# EAGLE board weatherbuoy pcb (EAGLE 9.7.0)
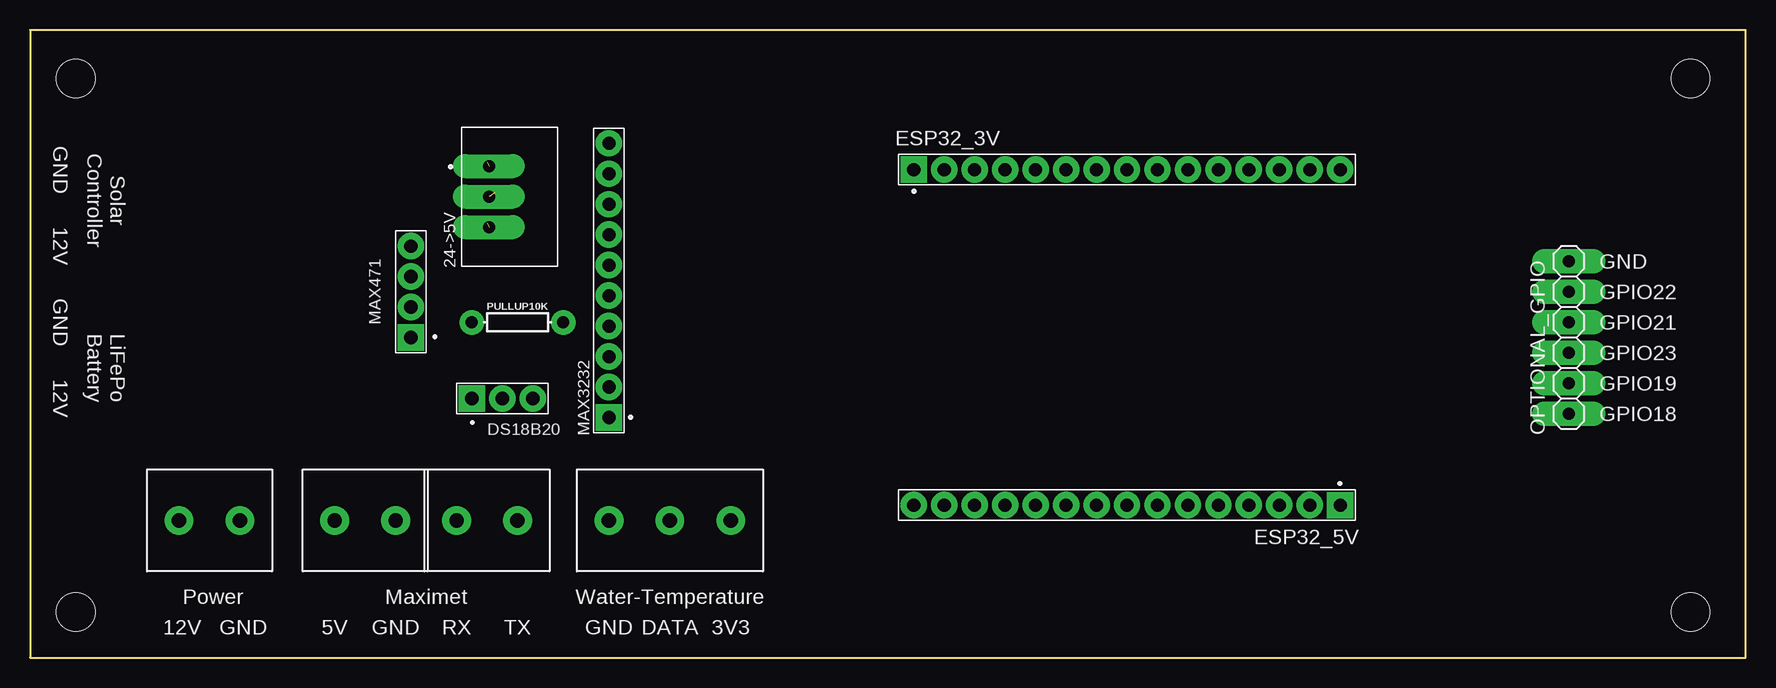
[diagram p0: board, top side]
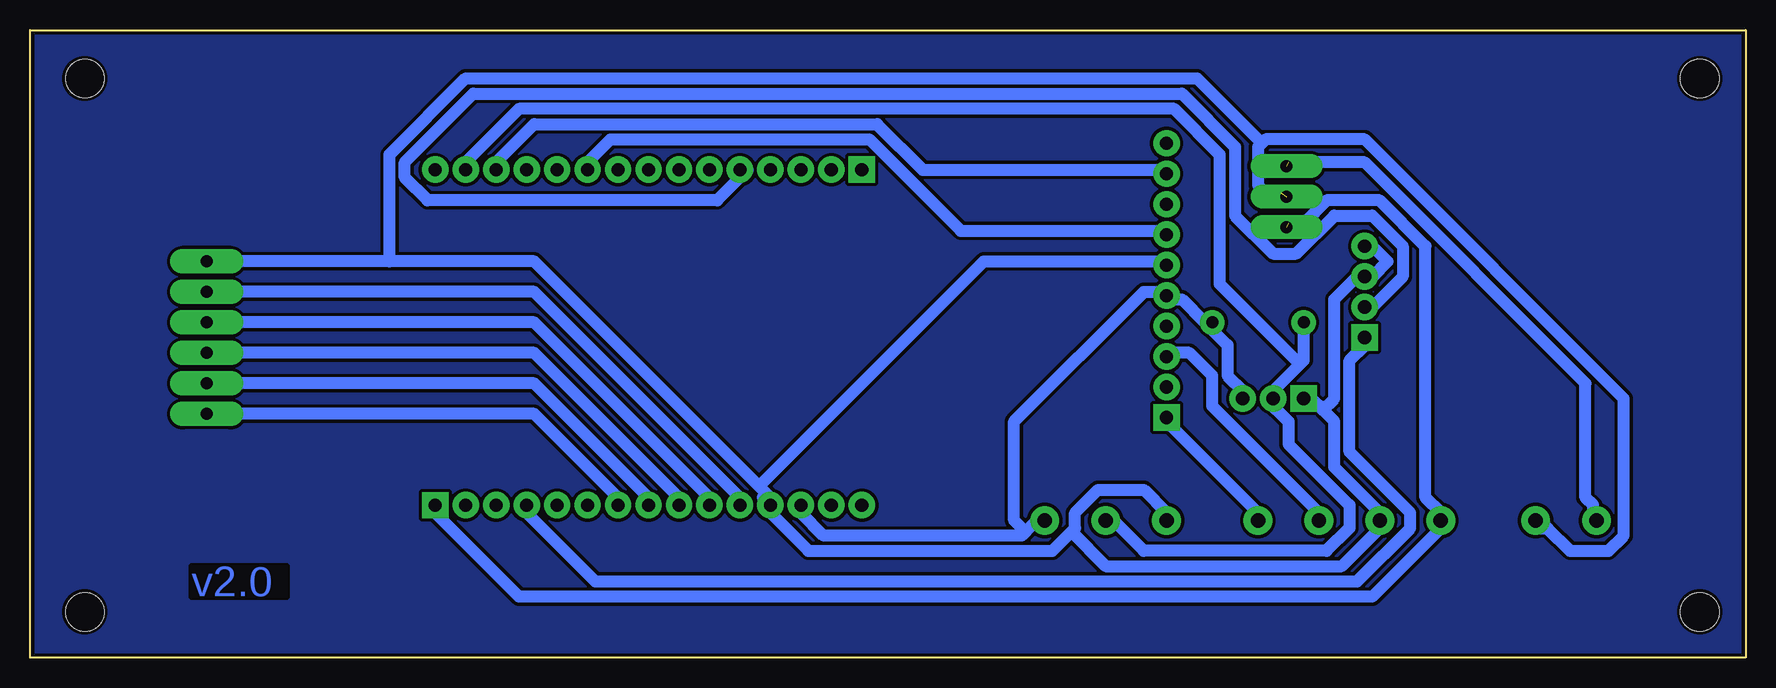
[diagram p1: board, bottom side, seen from below]

Size 143 x 52.3 mm. Coordinates in mm from the lower left corner, seen from the top.
Outline: 0,0 143,0 143,52.3 0,52.3 0,0
Copper layers 1*16: Top 0.035mm / dielectric 1.2mm / Bottom 0.2mm
Design rules "fusion360 electronics design rule 0.3mm engraver *": minimum track width 1mm, minimum drill 1mm, track to track 0.27mm, track to pad 0.27mm, pad to pad 0.27mm, via to via 0.27mm, smd to smd 0.25mm, copper to edge 0.27mm, drill to drill 50mil, minimum pad ring 0.2mm, minimum via ring 8mil, stop-mask expansion 0mil, vias tented up to drill 0mil, thermal gap 10mil
Net classes: 0 default: width 0.25 mm, drill 1 mm, clearance 0.25 mm; 1 esp32: width 0.25 mm, drill 1 mm, clearance 0.25 mm
Holes 3.2 mm at 3.81,48.26 3.81,3.81 138.43,3.81 138.43,48.26

## Footprints (pad centres in the part's own frame; a part is rotated, then mirrored left to right if it is on the bottom)
TERMBLK_508-2N = drill 1.2: 1 0,0; 2 5.08,0
173010535 = drill 1 pad 1.93 long: 1 -2.54,0; 2 0,0; 3 2.54,0
61300311121 = drill 1.1 square: 1 -2.54,0 | drill 1.1: 2 0,0; 3 2.54,0
61301511121 = drill 1.1 square: 1 -17.78,0 | drill 1.1: 2 -15.24,0; 3 -12.7,0; 4 -10.16,0; 5 -7.62,0; 6 -5.08,0; 7 -2.54,0; 8 0,0; 9 2.54,0; 10 5.08,0; 11 7.62,0; 12 10.16,0; 13 12.7,0; 14 15.24,0; 15 17.78,0
61300411121 = drill 1.1 square: 1 -3.81,0 | drill 1.1: 2 -1.27,0; 3 1.27,0; 4 3.81,0
61301011121 = drill 1.1 square: 1 -11.43,0 | drill 1.1: 2 -8.89,0; 3 -6.35,0; 4 -3.81,0; 5 -1.27,0; 6 1.27,0; 7 3.81,0; 8 6.35,0; 9 8.89,0; 10 11.43,0
1X06 = drill 1.016 long: 1 -6.35,0; 2 -3.81,0; 3 -1.27,0; 4 1.27,0; 5 3.81,0; 6 6.35,0
AXIAL-0.3 = drill 1 pad 2.032: P$1 -3.81,0; P$2 3.81,0
TERMBLK_508-3N = drill 1.2: 1 0,0; 2 5.08,0; 3 10.16,0

## Placement (x,y rotation side)
5V_MAXIMET  2828XX-2282837-2  [TERMBLK_508-2N]  30.48,11.43 180 top
12V_POWER  2828XX-2282837-2  [TERMBLK_508-2N]  17.5,11.43 180 top
24->5V  DCDC12V5V  [173010535]  38.27,38.41 270 top
DATA_MAXIMET  2828XX-2282837-2  [TERMBLK_508-2N]  40.64,11.43 180 top
DS18B20  61300311121  [61300311121]  39.37,21.59 0 top
ESP32_3V  61301511121  [61301511121]  91.44,40.66 0 top
ESP32_5V  61301511121  [61301511121]  91.44,12.7 180 top
MAX471  61300411121  [61300411121]  31.75,30.48 90 top
MAX3232  61301011121  [61301011121]  48.26,31.43 90 top
OPTIONAL_GPIO  PINHD-1X6  [1X06]  128.27,26.67 270 top
PULLUP10K  10k  [AXIAL-0.3]  40.64,27.94 0 top
WATER_TEMP_SENSOR  2828XX-3282837-3  [TERMBLK_508-3N]  48.26,11.43 0 top

## Library data of the parts
5V_MAXIMET DATA_MAXIMET = Connector; CATEGORY: Connector; DESCRIPTION: 2 Position Wire to Board Terminal Block Horizontal with Board 5.08 mm Through Hole; MANUFACTURER: TE Connectivity; MPN: 282837-2; OPERATING_TEMPERATURE: -40°C to +105°C; PART_STATUS: ACTIVE; ROHS_COMPLIANCE: RoHS Compliant; SERIES: 282837; SUBCATEGORY: Terminal Block; TYPE: Side Wire Entry
12V_POWER = Connector; CATEGORY: 12VBATTERY; DESCRIPTION: 2 Position Wire to Board Terminal Block Horizontal with Board 5.08 mm Through Hole; MANUFACTURER: TE Connectivity; MPN: 282837-2; OPERATING_TEMPERATURE: -40°C to +105°C; PART_STATUS: ACTIVE; ROHS_COMPLIANCE: RoHS Compliant; SERIES: 282837; SUBCATEGORY: Terminal Block; TYPE: Side Wire Entry
24->5V = DC-DC Converter; CREATED_BY: PCBLayout.com; DIGIKEY_PARTNO: 732-173010535-ND; MANUFACTURER: Würth Elektronik
DS18B20 = Headers; CREATED_BY: PCBLayout.com; DIGI_KEY_PART_NUMBER: 732-5316-ND; MANUFACTURER: Wurth Electronics Inc.; MPN: 61300311121
ESP32_3V ESP32_5V = Headers; CREATED_BY: PCBLayout.com; DIGIKEY_PART_NUMBER: 732-5326-ND; MANUFACTURER: Wurth Electronics Inc.; MPN: 61301511121
MAX471 = Headers; CREATED_BY: PCBLayout.com; DIGI_KEY_PART_NUMBER: 732-5317-ND; MANUFACTURER: Wurth Electronics Inc.; MPN: 61300411121
MAX3232 = Headers; CREATED_BY: PCBLayout.com; DIGIKEY_PART_NUMBER: 732-2670-ND; MANUFACTURER: Wurth Electronics Inc.; MPN: 61301011121
OPTIONAL_GPIO = Connector; CATEGORY: CONNECTOR
PULLUP10K = SparkFun-Resistors; PROD_ID: RES-12183
WATER_TEMP_SENSOR = Connector; CATEGORY: Connector; DESCRIPTION: TERM BLK 3P SIDE ENT 5.08mm PCB; MANUFACTURER: TE Connectivity; OPERATING_TEMPERATURE: -40°C to +105°C; PART_STATUS: Active; ROHS_COMPLIANCE: RoHS Compliant; SERIES: 282837; SUBCATEGORY: Terminal Block; TYPE: Side Wire Entry

## Nets
3V3: DS18B20.3 ESP32_5V.13 MAX3232.5 PULLUP10K.P$2 WATER_TEMP_SENSOR.3
5V: 5V_MAXIMET.2 24->5V.3 ESP32_5V.1
12V: 12V_POWER.2 24->5V.1
18B20DATA: DS18B20.2 ESP32_3V.14 PULLUP10K.P$1 WATER_TEMP_SENSOR.2
232RX: DATA_MAXIMET.2 MAX3232.3
232TX: DATA_MAXIMET.1 MAX3232.1
AT: ESP32_3V.5 MAX471.2
ESP_RX: ESP32_3V.13 MAX3232.9
ESP_TX: ESP32_3V.10 MAX3232.7
GND: 5V_MAXIMET.1 12V_POWER.1 24->5V.2 DS18B20.1 ESP32_5V.12 MAX471.3 MAX471.4 MAX3232.6 OPTIONAL_GPIO.1 WATER_TEMP_SENSOR.1
GPIO18: ESP32_5V.7 OPTIONAL_GPIO.6
GPIO19: ESP32_5V.8 OPTIONAL_GPIO.5
GPIO21: ESP32_5V.10 OPTIONAL_GPIO.3
GPIO22: ESP32_5V.11 OPTIONAL_GPIO.2
GPIO23: ESP32_5V.9 OPTIONAL_GPIO.4
VT: ESP32_5V.4 MAX471.1

## Tracks (layer width: path | path; a pad name or v marks a point on that pad's centre or on a via)
3V3
  Bottom 1: 45.09,27.94 46.99,29.84 48.26,29.84 MAX3232.5 48.26,30.48 50.16,30.48 60.96,19.68 60.96,11.43 60.01,10.48 | DS18B20.3 41.91,22.23 43.18,23.5 43.18,26.04 45.09,27.94 | 45.09,27.94 PULLUP10K.P$2 | ESP32_5V.13 78.74,12.06 76.83,10.16 60.33,10.16 60.01,10.48 | 60.01,10.48 59.05,11.43 WATER_TEMP_SENSOR.3
5V  (1 unrouted)
  Bottom 1: 38.1,36.2 36.83,36.2 34.92,38.1 30.48,38.1 26.67,34.29 26.67,13.34 25.4,12.06 5V_MAXIMET.2 25.4,10.79 31.11,5.08 102.23,5.08 109.22,12.06 ESP32_5V.1
12V  (1 unrouted)
  Bottom 1: 38.1,41.27 31.75,41.27 13.34,22.86 13.34,13.34 12.7,12.7 12.7,11.43 12V_POWER.2
18B20DATA
  Bottom 1: PULLUP10K.P$1 36.83,24.77 37.15,24.45 | 39.37,22.23 37.15,24.45 | 37.15,24.45 43.81,31.11 43.81,41.91 47.62,45.72 102.23,45.72 106.68,41.27 ESP32_3V.14 | WATER_TEMP_SENSOR.2 52.7,11.43 50.16,8.89 34.92,8.89 33.02,10.79 33.02,12.7 38.1,17.78 38.1,19.68 40.01,21.59 39.37,22.23 | 39.37,22.23 DS18B20.2
232RX
  Bottom 1: DATA_MAXIMET.2 35.56,12.06 44.45,20.95 44.45,23.5 46.35,25.4 48.26,25.4 MAX3232.3
232TX
  Bottom 1: DATA_MAXIMET.1 40.64,12.06 48.26,19.68 MAX3232.1
AT
  Bottom 1: MAX471.2 31.11,29.21 28.57,31.75 28.57,34.29 31.11,36.83 34.29,36.83 37.47,33.66 39.37,33.66 42.55,36.83 42.55,42.55 46.99,46.99 106.05,46.99 111.76,41.27 111.76,40.01 109.86,38.1 85.72,38.1 83.19,40.64 83.82,41.27 ESP32_3V.5
ESP_RX
  Bottom 1: MAX3232.9 48.26,40.64 68.58,40.64 72.39,44.45 100.97,44.45 104.14,41.27 ESP32_3V.13
ESP_TX
  Bottom 1: MAX3232.7 48.26,35.56 65.41,35.56 73.03,43.18 94.61,43.18 96.52,41.27 ESP32_3V.10
GND  (1 unrouted)
  Bottom 1: 38.73,38.73 40.01,38.73 40.64,39.37 40.64,42.55 40.32,42.86 | 40.32,42.86 40.01,43.18 31.75,43.18 10.16,21.59 10.16,10.16 11.43,8.89 14.61,8.89 16.51,10.79 17.78,10.79 17.78,11.43 12V_POWER.1 | MAX471.4 31.11,34.29 29.84,33.02 31.11,31.75 MAX471.3 32.38,31.75 34.29,29.84 34.29,21.59 35.24,20.64 | DS18B20.1 36.2,21.59 35.24,20.64 | 35.24,20.64 34.29,19.68 34.29,15.88 30.48,12.06 5V_MAXIMET.1 30.48,10.79 33.66,7.62 53.34,7.62 56.2,10.48 | 113.03,33.02 100.97,33.02 82.23,14.29 | 113.03,33.02 OPTIONAL_GPIO.1 | 82.23,14.29 81.28,13.34 ESP32_5V.12 81.92,13.34 81.92,12.7 78.11,8.89 57.78,8.89 56.2,10.48 | 82.23,14.29 63.5,33.02 48.26,33.02 MAX3232.6 | WATER_TEMP_SENSOR.1 48.26,12.06 50.16,13.97 53.98,13.97 55.88,12.06 55.88,10.79 56.2,10.48 | 40.32,42.86 45.72,48.26 106.68,48.26 113.03,41.91 113.03,33.02
GPIO18
  Bottom 1: OPTIONAL_GPIO.6 100.97,20.32 93.98,13.34 ESP32_5V.7
GPIO19
  Bottom 1: OPTIONAL_GPIO.5 100.97,22.86 91.44,13.34 ESP32_5V.8
GPIO21
  Bottom 1: OPTIONAL_GPIO.3 100.97,27.94 86.36,13.34 ESP32_5V.10
GPIO22
  Bottom 1: OPTIONAL_GPIO.2 100.97,30.48 83.82,13.34 ESP32_5V.11
GPIO23
  Bottom 1: OPTIONAL_GPIO.4 100.97,25.4 88.9,13.34 ESP32_5V.9
N$11
  pour Bottom: 0.08,0.08 142.92,0.08 142.92,52.22 0.08,52.22
VT
  Bottom 1: MAX471.1 31.75,26.04 33.02,24.77 33.02,17.14 27.94,12.06 27.94,10.79 32.38,6.35 95.89,6.35 101.6,12.06 ESP32_5V.4

## Text on the board
Bottom: v2.0
tNames: GND | Solar / Controller | 12V | GND | GPIO22 | GND | GPIO21 | GPIO23 | LiFePo / Battery | GPIO19 | 12V | GPIO18 | Power | Maximet | Water-Temperature | 12V | GND | 5V | GND | RX | TX | GND | DATA | 3V3